# Altium PCB HSensor.pcbdoc
Units mm, origin at the board's own origin, x right, y up, seen from the top; angles counter-clockwise.
Board outline 47.05 x 49.6 mm, 2 copper layers (Top Layer, Bottom Layer); 16 components, 13 nets, 70 pads, 11 vias.
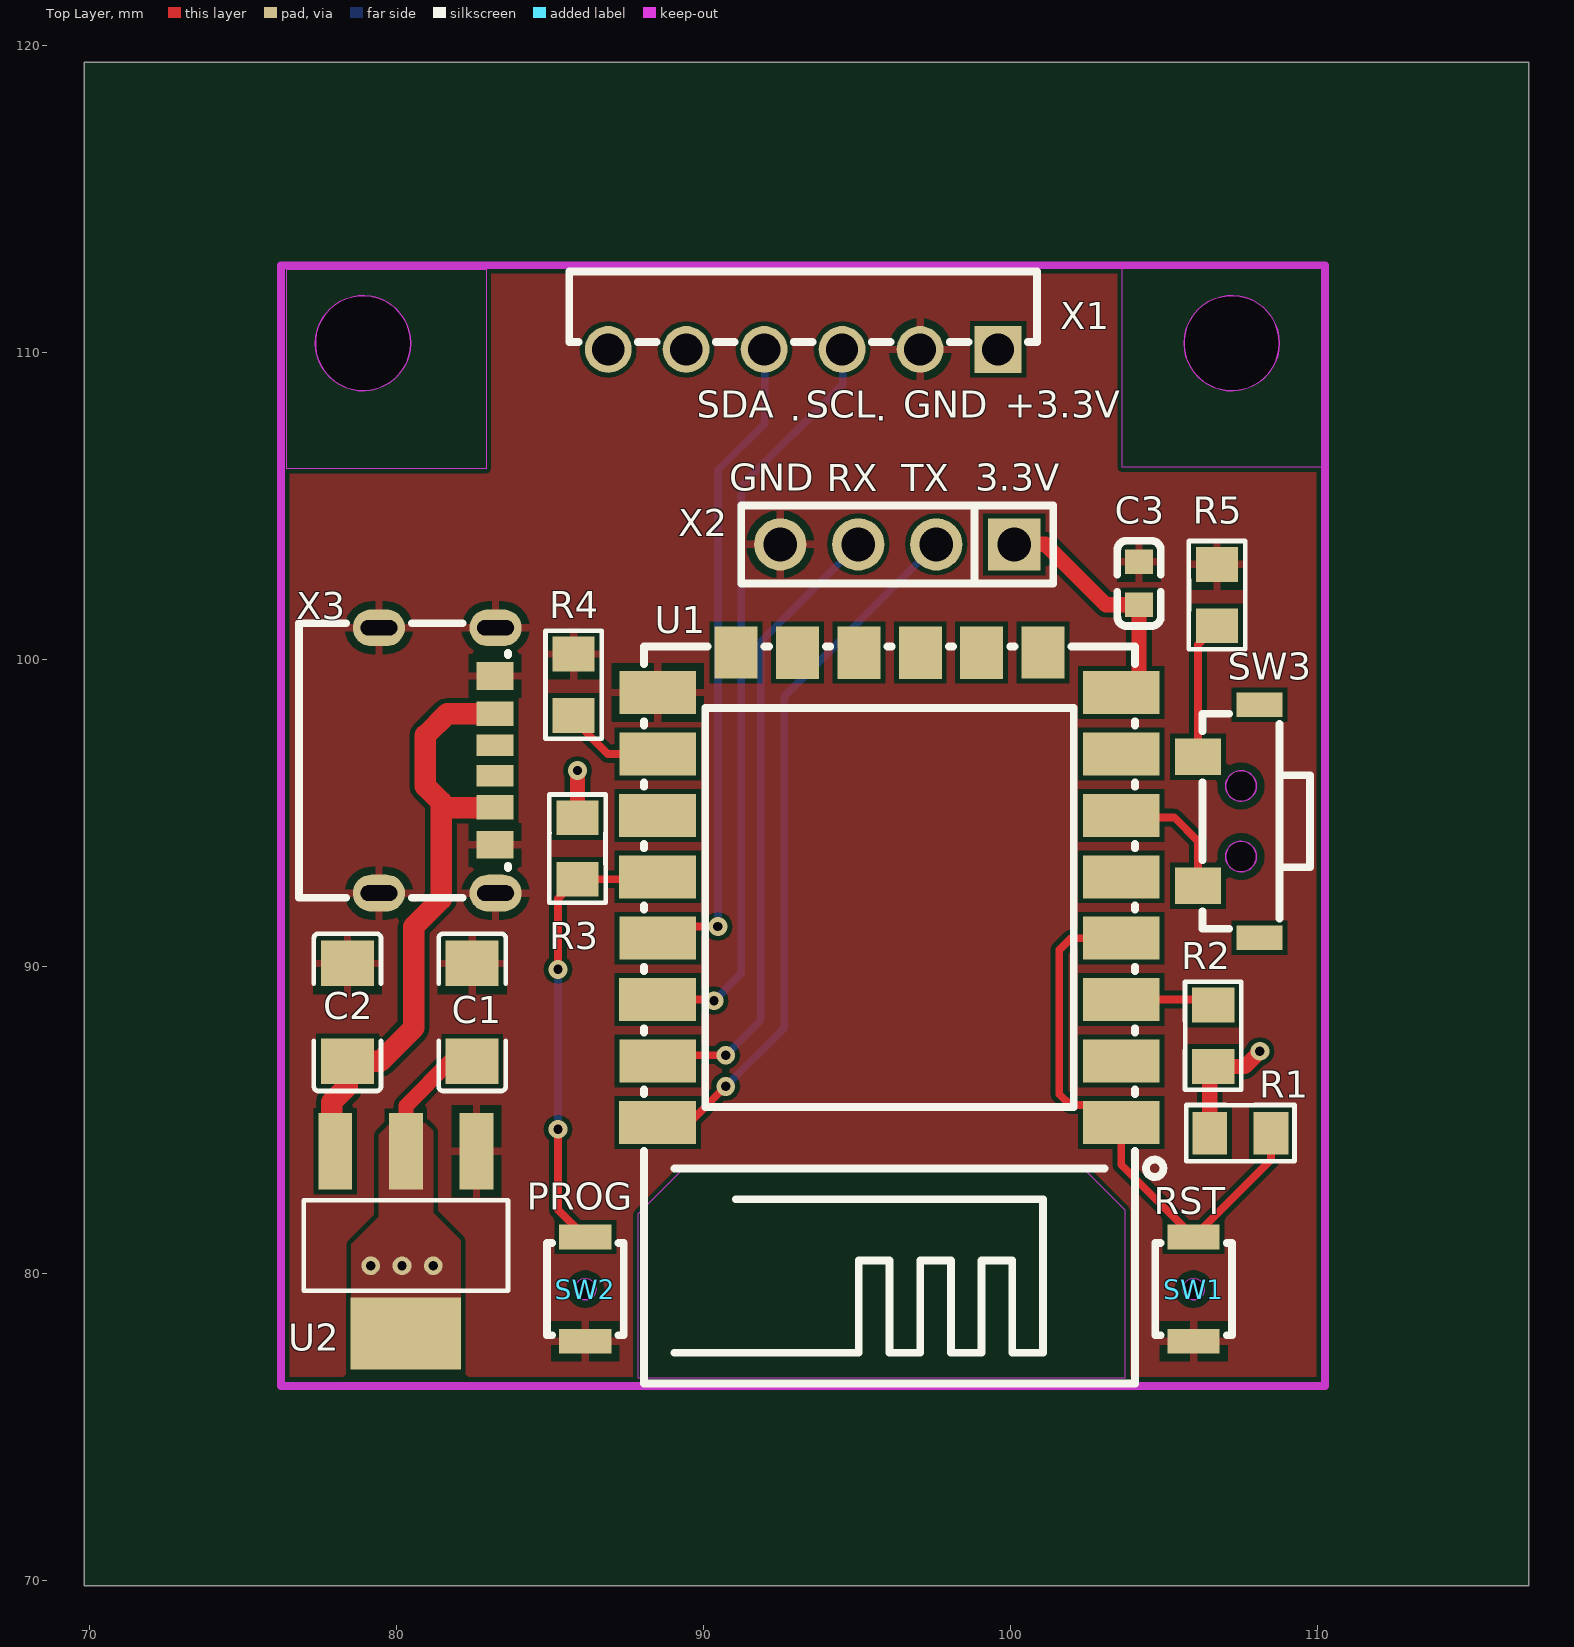
[diagram p0: Top Layer view]
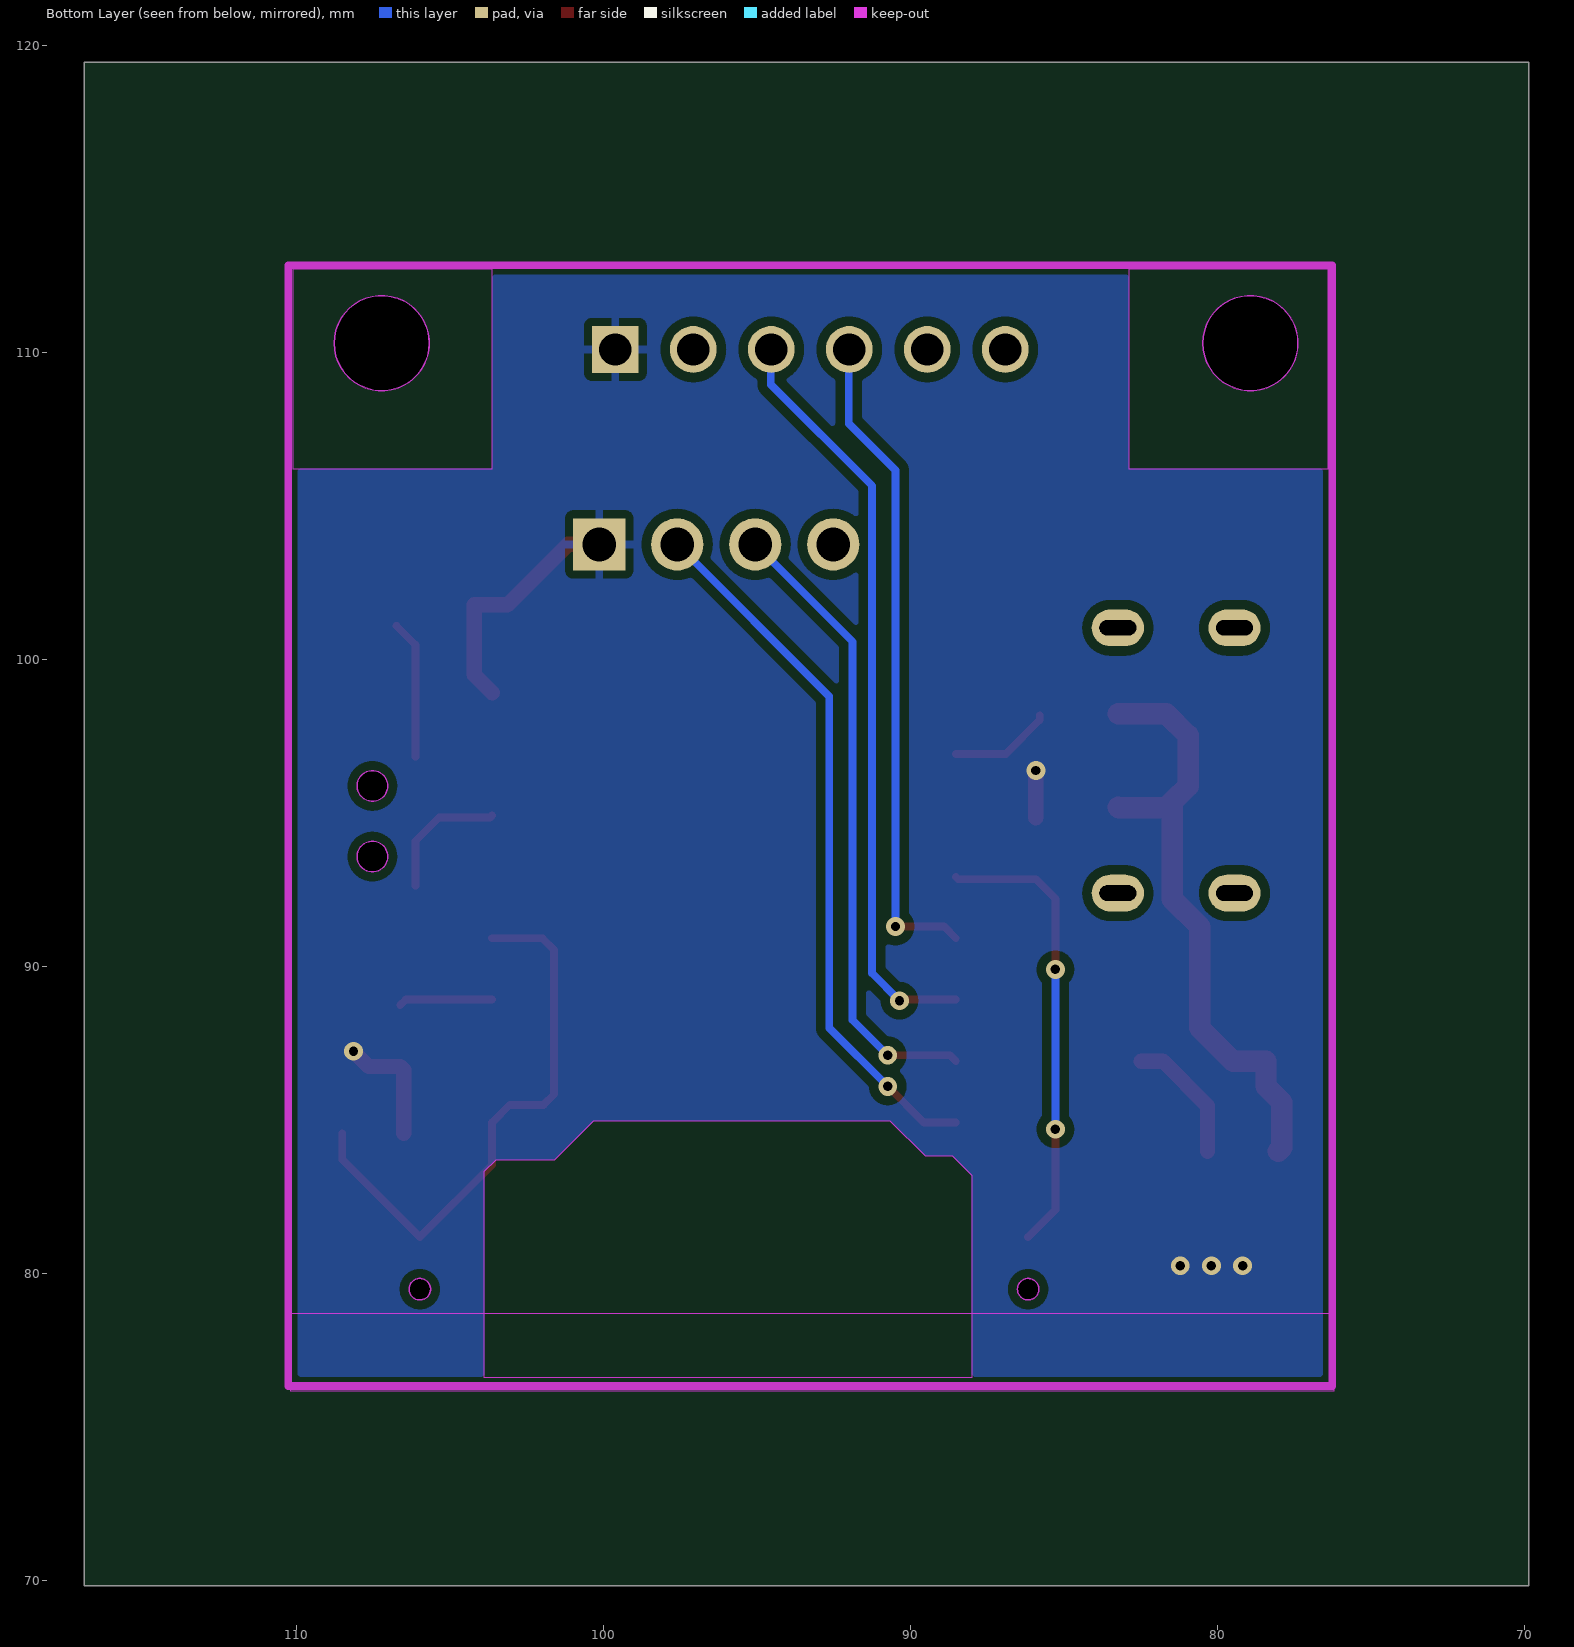
[diagram p1: Bottom Layer view, seen from below]

## Layer stack, top to bottom
Top Solder Mask Layer: solder mask 0.0102, Solder Resist, Dk 3.5
Top Layer: signal copper 0.0356
Dielectric1: dielectric 0.32, FR-4, Dk 4.8
Bottom Layer: signal copper 0.0356
Bottom Solder Mask Layer: solder mask 0.0102, Solder Resist, Dk 3.5

## Board outline
116.896,69.85 69.85,69.85 69.85,119.455 116.896,119.455
cut-out: 80.473,110.311 cw(c78.923,110.311) 77.373,110.311 cw(c78.923,110.311) 80.473,110.311
cut-out: 108.764,110.311 cw(c107.214,110.311) 105.664,110.311 cw(c107.214,110.311) 108.764,110.311

## Design rules (kind name [scope] priority, off if disabled: settings)
BoardOutlineClearance copperThickness1oz_1 [All] p1: gap=0.254 ignorepadtopadclearanceinfootprint=FALSE except(0: Arc-SplitContinuation Track-SplitContinuation SMDPad-SplitContinuation THPad-SplitContinuation Via-SplitContinuation Fill-SplitContinuation Poly-SplitContinuation Region-SplitContinuation Text-SplitContinuation; 0.152: Track-CutoutEdge SMDPad-CutoutEdge THPad-CutoutEdge Via-CutoutEdge Region-CutoutEdge; 0.3: Track-OutlineEdge SMDPad-OutlineEdge THPad-OutlineEdge Via-OutlineEdge Fill-OutlineEdge Fill-CutoutEdge Poly-OutlineEdge Region-OutlineEdge Text-OutlineEdge)
BoardOutlineClearance copperThickness2oz_1 [All] p2: gap=0.254 ignorepadtopadclearanceinfootprint=FALSE except(0: Arc-SplitContinuation Track-SplitContinuation SMDPad-SplitContinuation THPad-SplitContinuation Via-SplitContinuation Fill-SplitContinuation Poly-SplitContinuation Region-SplitContinuation Text-SplitContinuation; 0.152: Track-CutoutEdge SMDPad-CutoutEdge THPad-CutoutEdge Via-CutoutEdge Region-CutoutEdge; 0.3: Track-OutlineEdge SMDPad-OutlineEdge THPad-OutlineEdge Via-OutlineEdge Fill-OutlineEdge Fill-CutoutEdge Poly-OutlineEdge Region-OutlineEdge Text-OutlineEdge)
Clearance copperThickness1oz [(InNet('+5V') OR InNet('+3.3V') OR InNet('GND') OR InNet('SCL') OR InNet('RXD') OR InNet('TXD') OR InNet('$3N4057') OR InNet('$3N4059') OR InNet('$3N4550') OR InNet('$3N6812') OR InNet('SDA') OR InNet('$3N6937') OR InNet('$3N6931'))] p1: gap=0.152 ignorepadtopadclearanceinfootprint=FALSE except(0.102: Track-Track; 0.175: Track-Hole SMDPad-Hole THPad-Hole Via-Hole Fill-Hole Poly-Hole Region-Hole Text-Hole; 0.178: Arc-Arc Arc-Track Arc-SMDPad Arc-THPad Arc-Via Arc-Fill Arc-Poly Arc-Region Arc-Text Arc-Hole; 0.3: Track-Fill Fill-Region)
Clearance copperThickness2oz [All] p2: gap=0.152 ignorepadtopadclearanceinfootprint=FALSE except(0.175: Track-Hole SMDPad-Hole THPad-Hole Via-Hole Fill-Hole Poly-Hole Region-Hole Text-Hole; 0.178: Arc-Arc Arc-Track Arc-SMDPad Arc-THPad Arc-Via Arc-Fill Arc-Poly Arc-Region Arc-Text Arc-Hole; 0.203: Track-Track; 0.3: Track-Fill Fill-Region)
DiffPairsRouting differentialPair [All] p1: maxlimit=0.152 minlimit=0.152 mostfreqgap=0.152 toplayer_minwidth=0.127 toplayer_maxwidth=2.54 toplayer_prefwidth=0.254 bottomlayer_minwidth=0.127 bottomlayer_maxwidth=2.54 bottomlayer_prefwidth=0.254 maxuncoupledlength=0.254
PasteMaskExpansion pasteMaskExpansion [All] p1: expansion=0
PlaneConnect innerPlane [All] p1: planeconnectstyle=Relief reliefexpansion=0.508 reliefentries=4 reliefconductorwidth=0.254 reliefairgap=0.254
PolygonConnect copperRegion [All] p1: connectstyle=Relief reliefconductorwidth=0.254 reliefentries=4 polygonreliefangle="90 Angle" airgapwidth=0.254
PolygonConnect dir [All] p2: connectstyle=Direct reliefconductorwidth=0.254 reliefentries=4 polygonreliefangle="90 Angle" airgapwidth=0.254
RoutingVias viaSize [All] p1: holewidth=0.305 width=0.61 viastyle="Through Hole" minholewidth=0.3 minwidth=0.5 maxholewidth=6.3 maxwidth=10
SolderMaskExpansion solderMaskExpansion [All] p1: expansion=0.051 istentingtop=FALSE useseparateexpansions=TRUE expansionbottom=0.051 istentingbottom=FALSE
Width copperThickness1oz_2 [All] p1: maxlimit=2.54 minlimit=0.127 preferedwidth=0.254
Width copperThickness2oz_2 [All] p2: maxlimit=2.54 minlimit=0.203 preferedwidth=0.508
27 further rules are at their usual default settings.

## Components (designator, comment, footprint, x,y, rotation, side; value= is the part's Value field where it differs from the comment)
C1 "CL31A226KOHNNNE" C1206 82.479,88.519 r270 top
C2 "CL31A226KOHNNNE" C1206 78.415,88.519 r270 top
C3 "CC0603KRX7R9BB104" C0603 104.196,102.489 r270 top
R1 "FRC0805J103TS" R0805 107.498,84.582 r180 top
R2 "FRC0805J103TS" R0805 106.609,87.757 r270 top
R3 "FRC0805J103TS" R0805 85.908,93.853 r90 top
R4 "FRC0805J103TS" R0805 85.781,99.187 r270 top
R5 "FRC0805J103TS" R0805 106.736,102.108 r270 top
SW1 "TS-3025-A-C-A" SW-SMD_L3.0-W2.5-P3.40-LS4.0-EH 105.974,79.502 r90 top
SW2 "TS-3025-A-C-A" SW-SMD_L3.0-W2.5-P3.40-LS4.0-EH 86.162,79.502 r90 top
SW3 "KAN3543-0351C1-29/449" SW-SMD_GANGYUAN_KAN3543-0351C1 107.117,94.742 r90 top
U1 "ESP-12F(ESP8266MOD)" WIFIM-SMD_ESP-12F-ESP8266MOD 96.068,92.583 r90 top
U2 "AMS1117-3.3" SOT-223-3_L6.4-W3.5-P2.30-LS7.0-BR 80.32,81.026 r90 top
X1 "PZ2.54-1*6-FWZ" HDR-TH_6P-P2.54-H-M-W8.6-N 93.256,110.109 r180 top
X2 "PZ2.54-1x4-11.2" HDR-TH_4P-P2.54-V-M 96.322,103.759 r180 top
X3 "HX TYPE-C 6PIN" USB-C-SMD_HX-TYPE-C-6PIN 81.34,96.722 r270 top

## Footprints (in the part's own frame and the unit in brackets; to place one, negate y for a bottom-side part, rotate by r counter-clockwise, add the part's x,y. Pads: shape width x height; smd on the part's side, far side on the other; paste and mask are expansions set on the pad)
C0603 [mm]
  rect 0.8x0.9 smd: 1(-0.7,0) 2(0.7,0)
  silkscreen extent -1.39,-0.71 1.39,0.71
C1206 [mm]
  rect 1.485x1.728 smd paste-100 mask+0.051: 1(-1.593,0) 2(1.593,0)
  silkscreen extent -2.56,-1.09 2.56,1.09
HDR-TH_4P-P2.54-V-M [mm]
  rect 1.7x1.7 hole 1.1: 1(-3.81,0)
  round 1.7 hole 1.1: 2(-1.27,0) 3(1.27,0) 4(3.81,0)
  silkscreen extent -5.08,-1.27 5.08,1.27
HDR-TH_6P-P2.54-H-M-W8.6-N [mil]
  rect 60x60 hole 41.34 paste+0 mask+1.97: 1(-250,0)
  round 60 hole 41.34 paste+0 mask+1.97: 2(-150,0) 3(-50,0) 4(50,0) 5(150,0) 6(250,0)
  silkscreen extent -300,-100 300,-9
R0805 [mm]
  rect 1.133x1.377 smd paste-100 mask+0.051: 1(-1,0) 2(1,0)
  silkscreen extent -1.76,-0.92 1.76,0.92
SOT-223-3_L6.4-W3.5-P2.30-LS7.0-BR [mm]
  rect 2.5x1.1 smd: 1(2.97,-2.3) 2(2.97,0) 3(2.97,2.3)
  rect 2.34x3.6 smd: 4(-2.97,0)
  silkscreen extent -1.57,-3.33 1.37,3.33
SW-SMD_GANGYUAN_KAN3543-0351C1 [mm]
  rect 1.2x1.5 smd paste+0 mask+0.05: 1(-2.1,1) 2(2.1,1)
  rect 0.8x1.5 smd paste+0 mask+0.05: 3(3.8,-1) 4(-3.8,-1)
  Board Outline Layer board cut-out: -1.15,-0.9 -1.367,-0.851 -1.541,-0.712 -1.637,-0.511 -1.637,-0.289 -1.541,-0.088 -1.367,0.05 -1.15,0.1 -1.15,0.1 -0.933,0.05 -0.759,-0.088 -0.663,-0.289 -0.663,-0.511 -0.759,-0.712 -0.933,-0.851 -1.15,-0.9 -1.15,-0.9
  Board Outline Layer board cut-out: 1.15,-0.9 0.933,-0.851 0.759,-0.712 0.663,-0.511 0.663,-0.289 0.759,-0.088 0.933,0.05 1.15,0.1 1.15,0.1 1.367,0.05 1.541,-0.088 1.638,-0.289 1.638,-0.511 1.541,-0.712 1.367,-0.851 1.15,-0.9 1.15,-0.9
  Board Outline Layer circle w0.005: c-1.15,-0.4 r0.5
  Board Outline Layer circle w0.005: c1.15,-0.4 r0.5
  Board Outline Layer region: -1.15,-0.9 -1.367,-0.851 -1.541,-0.712 -1.637,-0.511 -1.637,-0.289 -1.541,-0.088 -1.367,0.05 -1.15,0.1 -1.15,0.1 -0.933,0.05 -0.759,-0.088 -0.663,-0.289 -0.663,-0.511 -0.759,-0.712 -0.933,-0.851 -1.15,-0.9 -1.15,-0.9
  Board Outline Layer region: 1.15,-0.9 0.933,-0.851 0.759,-0.712 0.663,-0.511 0.663,-0.289 0.759,-0.088 0.933,0.05 1.15,0.1 1.15,0.1 1.367,0.05 1.541,-0.088 1.638,-0.289 1.638,-0.511 1.541,-0.712 1.367,-0.851 1.15,-0.9 1.15,-0.9
  silkscreen extent -3.5,-2.65 3.5,0.85
SW-SMD_L3.0-W2.5-P3.40-LS4.0-EH [mm]
  rect 0.8x1.7 smd: 1(-1.7,0) 2(1.7,0)
  Board Outline Layer board cut-out: 0,-0.35 -0.152,-0.315 -0.274,-0.218 -0.341,-0.078 -0.341,0.078 -0.274,0.218 -0.152,0.315 0,0.35 0,0.35 0.152,0.315 0.274,0.218 0.341,0.078 0.341,-0.078 0.274,-0.218 0.152,-0.315 0,-0.35 0,-0.35
  Board Outline Layer circle w0.005: c0,0 r0.35
  Board Outline Layer region: 0,-0.35 -0.152,-0.315 -0.274,-0.218 -0.341,-0.078 -0.341,0.078 -0.274,0.218 -0.152,0.315 0,0.35 0,0.35 0.152,0.315 0.274,0.218 0.341,0.078 0.341,-0.078 0.274,-0.218 0.152,-0.315 0,-0.35 0,-0.35
  silkscreen extent -1.5,-1.25 1.5,1.25
USB-C-SMD_HX-TYPE-C-6PIN [mm]
  oval 1.2x1.7 hole 0.5 slot 1.2 at 90 deg: 13(-4.32,1.9) 14(4.32,1.9) 15(-4.32,-1.9) 16(4.32,-1.9)
  rect 0.7x1.2 smd paste-100 mask+0.051: A5(-0.5,1.88) B5(0.5,1.88)
  rect 0.8x1.2 smd paste-100 mask+0.051: A9(1.52,1.88) B9(-1.52,1.88)
  rect 0.9x1.2 smd paste-100 mask+0.051: A12(2.75,1.88) B12(-2.75,1.88)
  silkscreen extent -4.47,-4.5 4.47,2.3
WIFIM-SMD_ESP-12F-ESP8266MOD [mm]
  rect 1.4x2.5 smd: 1(-7.651,-7.551) 2(-5.651,-7.551) 3(-3.651,-7.551) 4(-1.651,-7.551) 5(0.349,-7.551) 6(2.349,-7.551) 7(4.349,-7.551) 8(6.349,-7.551) 9(6.349,7.549) 10(4.349,7.55) 11(2.349,7.551) 12(0.349,7.551) 13(-1.651,7.55) 14(-3.651,7.551) 15(-5.651,7.55) 16(-7.651,7.551)
  rect 1.7x1.4 smd: 17(7.651,-5) 18(7.649,-3.002) 19(7.65,-1.003) 20(7.65,0.997) 21(7.65,2.997) 22(7.65,4.997)
  silkscreen extent -16.15,-8.92 7.85,8

## Via types
v1: diameter 0.61, hole 0.305, Top Layer to Bottom Layer, 11 vias

## Nets (pads, with @x,y where several pads share a name; then routed paths per layer and width w, separated by ;. In a path a pad name is that pad's centre, name@x,y a point inside that pad or via, vN(x,y) a via of type N, cw(c..) or ccw(c..) an arc to the next point about the centre after c; other vN are vias at no path point)
$3N4057: R1.1 SW1.2 U1.1 U1.4 | length 18.4
  Top Layer w0.254: U1.4 101.981,90.932 101.6,90.551 101.6,85.852 101.947,85.505 103.047,85.505 U1.1 103.62,83.557 SW1.2 108.498,83.726 R1.1
$3N4059: R2.1 U1.3 | length 3.1
  Top Layer w0.254: U1.3 106.434,88.932 R2.1
$3N4550: R3.1 SW2.2 U1.12 | length 14.9
  Top Layer w0.254: v1(85.273,84.709) 85.273,82.091 SW2.2 ; v1(85.273,89.916) 85.273,92.218 R3.1 88.438,92.853 U1.12
  Bottom Layer w0.254: v1(85.273,84.709) v1(85.273,89.916)
$3N6812: R4.2 U1.10 | length 3.3
  Top Layer w0.254: R4.2 85.781,98.044 86.893,96.932 U1.10
$3N6931: R5.2 SW3.2 | length 4.5
  Top Layer w0.254: SW3.2 106.117,100.489 R5.2
$3N6937: SW3.1 U1.6 | length 4.3
  Top Layer w0.254: U1.6 103.683,94.869 105.339,94.869 106.117,94.091 SW3.1
+3.3V: C1.2 C3.2 R1.2 R2.2 R3.2 U1.8 U2.2 U2.4 X1.1 X2.1 | length 17.7
  Top Layer w0.5: U2.2 80.32,85.471 81.776,86.926 C1.2 ; R3.2 v1(85.908,96.393) ; X2.1 101.148,103.759 103.118,101.789 C3.2 104.196,99.51 U1.8 ; R1.2 106.498,86.646 R2.2 107.641,86.757 v1(108.133,87.249)
  other v1: 79.177,80.264 80.193,80.264 81.209,80.264
+5V: C2.2 U2.3 X3.A9 X3.B9 | length 20.3
  Top Layer w0.7: U2.3 77.907,84.109 77.907,85.598 78.415,86.106 C2.2 79.49,86.926 80.574,88.011 80.574,91.313 81.463,92.202 81.463,95.377 ; X3.A9 83.207,95.189 81.651,95.189 81.463,95.377 ; X3.B9 81.661,98.242 80.955,97.536 80.955,95.885 81.463,95.377
GND: C1.1 C2.1 C3.1 R4.1 R5.1 SW1.1 SW2.1 U1.9 U2.1 X1.2 X2.4 X3.13 X3.14 X3.15 X3.16 X3.A12 X3.B12
RXD: U1.15 X2.3 | length 20.7
  Top Layer w0.254: U1.15 88.707,87.122 v1(90.734,87.122)
  Bottom Layer w0.254: v1(90.734,87.122) 91.877,88.265 91.877,100.584 X2.3
SCL: U1.14 X1.3 | length 25
  Top Layer w0.254: U1.14 90.321,88.932 v1(90.353,88.9)
  Bottom Layer w0.254: v1(90.353,88.9) 91.242,89.789 91.242,105.664 94.544,108.966 94.544,109.601 X1.3@94.036,110.109
SDA: U1.13 X1.4 | length 21.8
  Top Layer w0.254: U1.13 88.899,91.313 v1(90.48,91.313)
  Bottom Layer w0.254: v1(90.48,91.313) 90.48,106.172 92.004,107.696 92.004,109.601 X1.4@91.496,110.109
TXD: U1.16 X2.2 | length 23.2
  Top Layer w0.254: U1.16 89.56,84.932 v1(90.734,86.106)
  Bottom Layer w0.254: v1(90.734,86.106) 92.639,88.011 92.639,98.806 X2.2
pads on no net: SW3.3 SW3.4 U1.2 U1.5 U1.7 U1.11 U1.17 U1.18 U1.19 U1.20 U1.21 U1.22 X1.5 X1.6 X3.A5 X3.B5

## Polygon pours and split planes (outlines as drawn)
+3.3V on Bottom Layer "Bottom Layer-+3.3V" (solid, remove dead copper, pour order 4): 76.383,113.105 110.165,113.105 110.165,76.529 76.383,76.529
GND on Top Layer "Top Layer-GND" (solid, remove dead copper, pour order 2): 76.256,112.822 110.546,112.822 110.546,76.656 76.256,76.656
+3.3V on Top Layer "Top Layer-+3.3V" (solid, remove dead copper, pour order 0): 78.542,77.799 78.542,80.974 79.431,81.863 79.431,84.53 79.812,84.911 80.955,84.911 81.209,84.657 81.209,81.99 82.098,81.101 82.098,78.752 80.955,77.609 80.955,77.545 78.796,77.545

## Keep-outs
Top Layer:
  region: 103.643,112.776 110.143,112.776 110.143,106.276 103.643,106.276 103.643,112.776
  region: 76.435,112.724 82.935,112.724 82.935,106.224 76.435,106.224 76.435,112.724
  region: 89.265,83.341 87.868,81.944 87.868,76.61 103.743,76.61 103.743,82.071 102.473,83.341 89.265,83.341
Bottom Layer:
  region: 76.2,78.7 110.2,78.7 110.2,76.2 76.2,76.2 76.2,78.7
  region: 76.383,112.724 82.883,112.724 82.883,106.224 76.383,106.224 76.383,112.724
  region: 103.613,112.724 110.113,112.724 110.113,106.224 103.613,106.224 103.613,112.724
  region: 88.63,83.849 87.995,83.214 87.995,76.61 103.87,76.61 103.87,83.341 103.489,83.722 101.584,83.722 100.314,84.992 90.662,84.992 89.519,83.849 88.63,83.849
Board Outline Layer:
  circle w0.025: c78.923,110.311 r1.55
  circle w0.025: c107.214,110.311 r1.55
  region: 80.473,110.311 cw(c78.923,110.311) 77.373,110.311 cw(c78.923,110.311) 80.473,110.311
  region: 108.764,110.311 cw(c107.214,110.311) 105.664,110.311 cw(c107.214,110.311) 108.764,110.311
  lines w0.254: 76.256,76.351 110.256,76.351 110.256,112.851 76.256,112.851 76.256,76.351

## Silkscreen, mask and mechanical layers (free items; w line width, h text height)
Top Silkscreen Layer:
  text "SDA" at 89.789,107.586 h1.5
  text "SCL" at 93.345,107.586 h1.5
  text "GND" at 96.52,107.586 h1.5
  text "+3.3V" at 99.822,107.586 h1.5
  text "." at 92.817,107.493 h1.5
  text "." at 95.611,107.493 h1.5
  text "GND" at 90.857,105.206 h1.5
  text "3.3V" at 98.858,105.206 h1.5
  text "RX" at 94.033,105.189 h1.5
  text "TX" at 96.445,105.189 h1.5
  text "PROG" at 84.251,81.798 h1.5
  text "RST" at 104.679,81.652 h1.5
Mechanical Layer:
  circle w0.025: c78.923,110.311 r1.55
  circle w0.025: c107.214,110.311 r1.55